# Altium PCB 5811.PcbDoc
Units mil, origin at the board's own origin, x right, y up, seen from the top; angles counter-clockwise.
Board outline 1540.03 x 624.03 mil, 4 copper layers (Top Layer, Internal Plane 1, Signal Layer 1, Bottom Layer), stack 36.417 mil thick; 51 components, 34 nets, 144 pads, 15 vias.
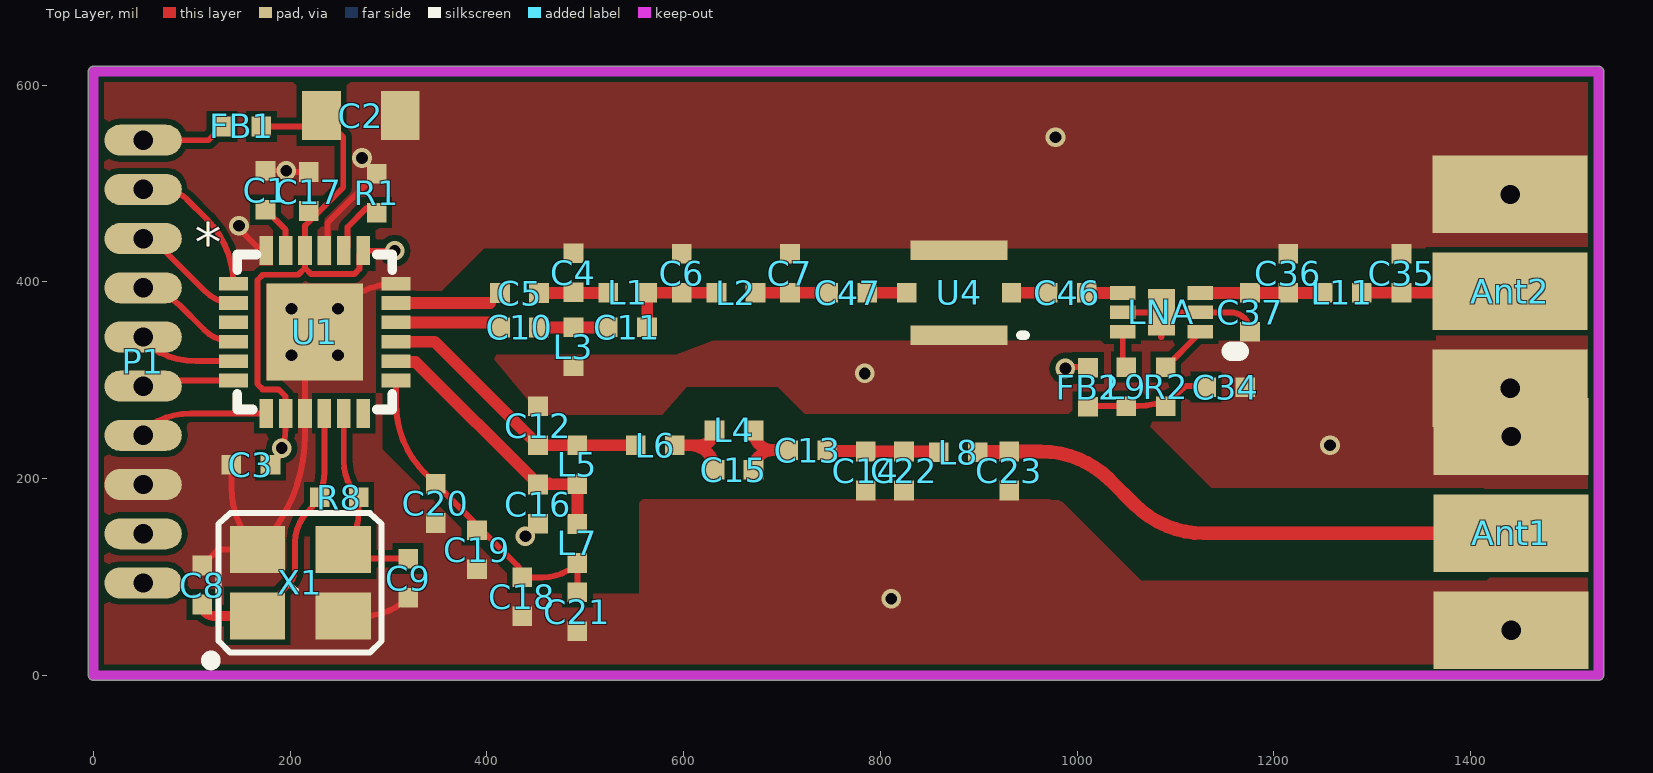
[diagram p0: Top Layer view]
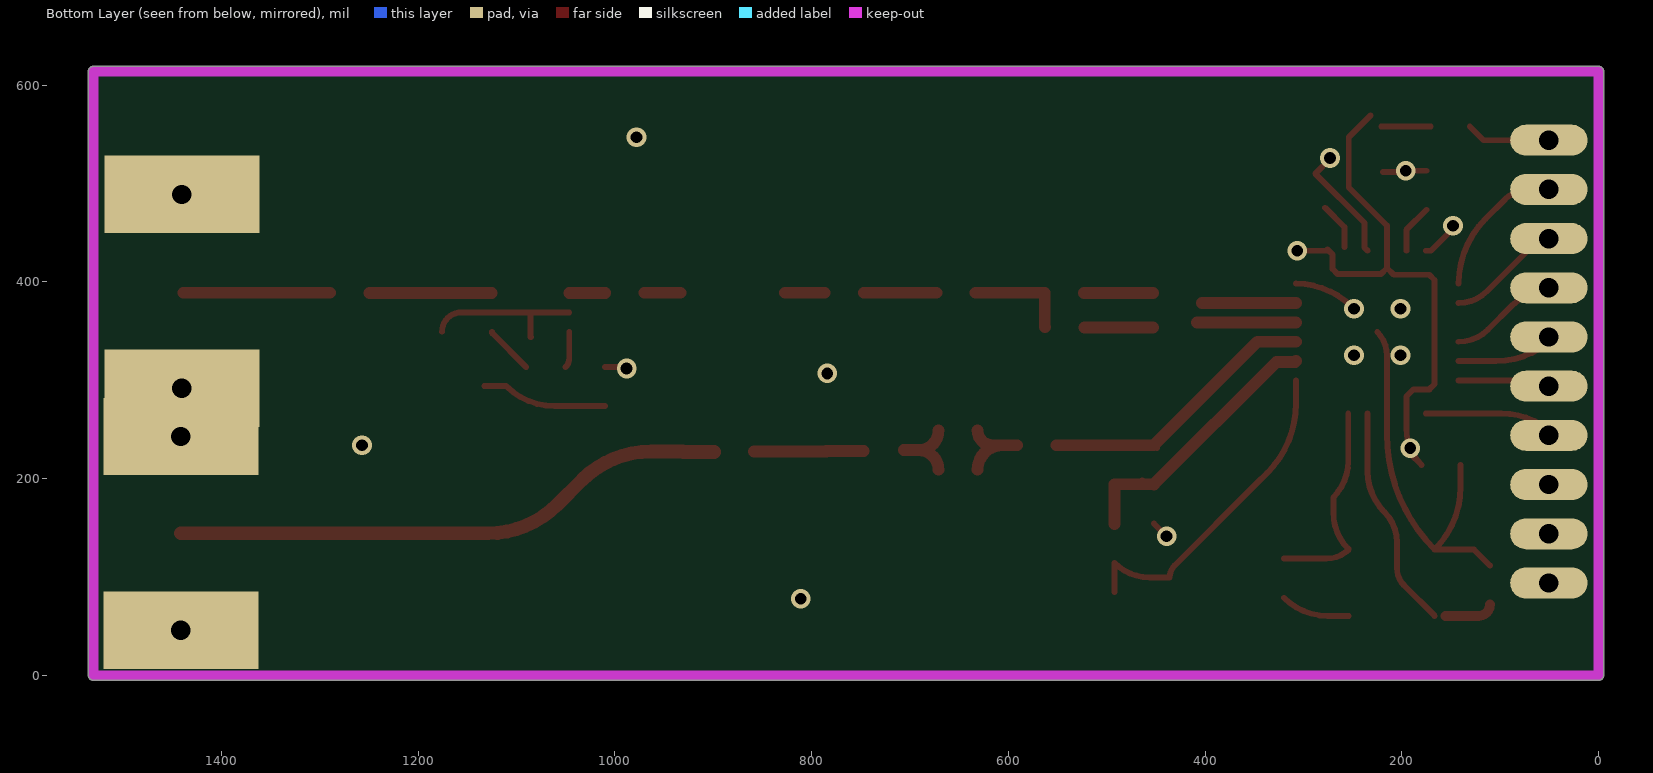
[diagram p1: Bottom Layer view, seen from below]
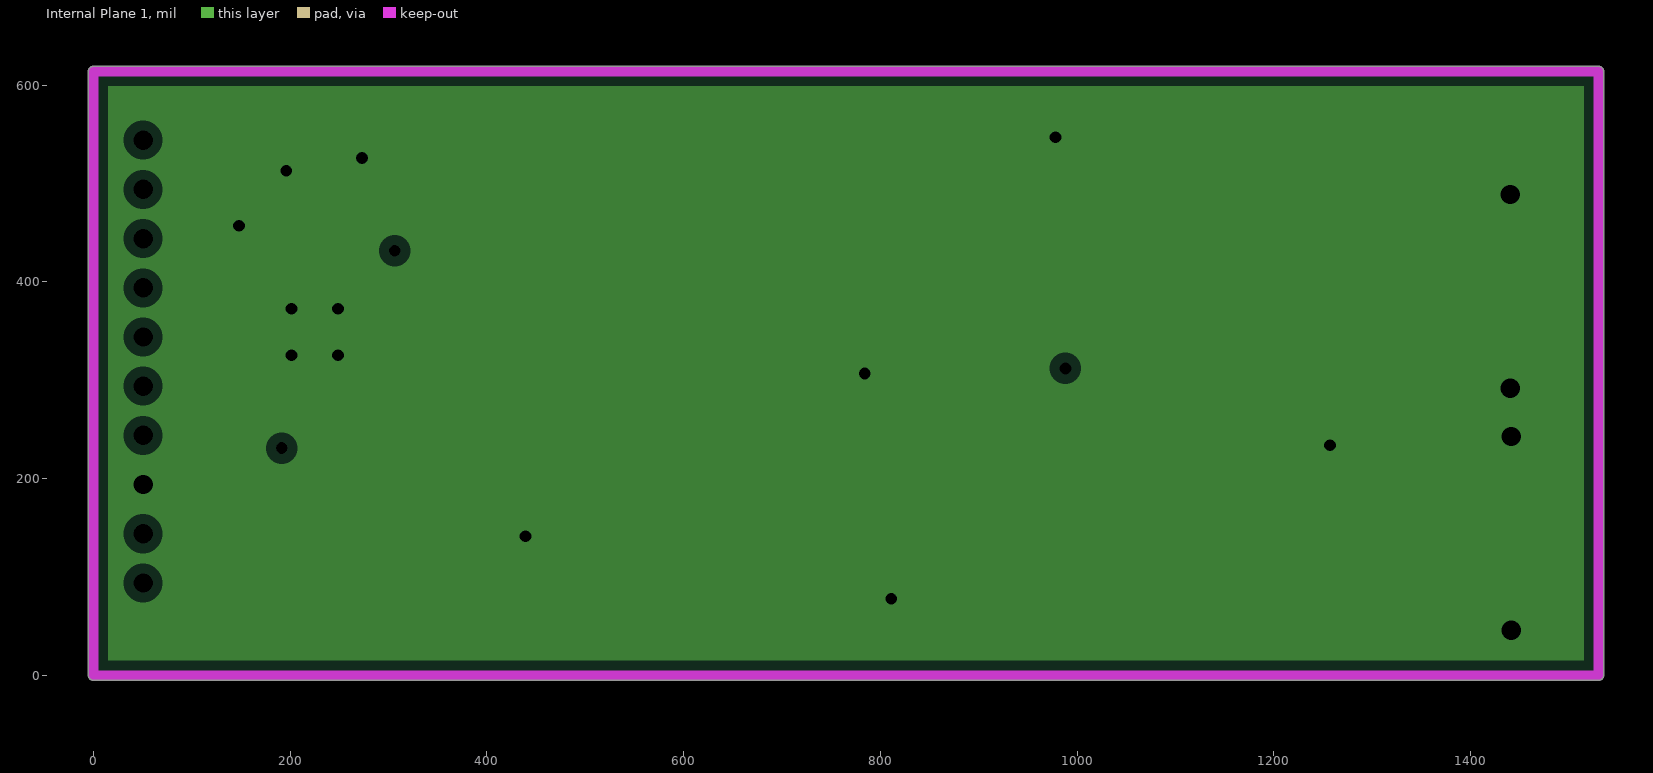
[diagram p2: Internal Plane 1, clearances drawn from the general rule]
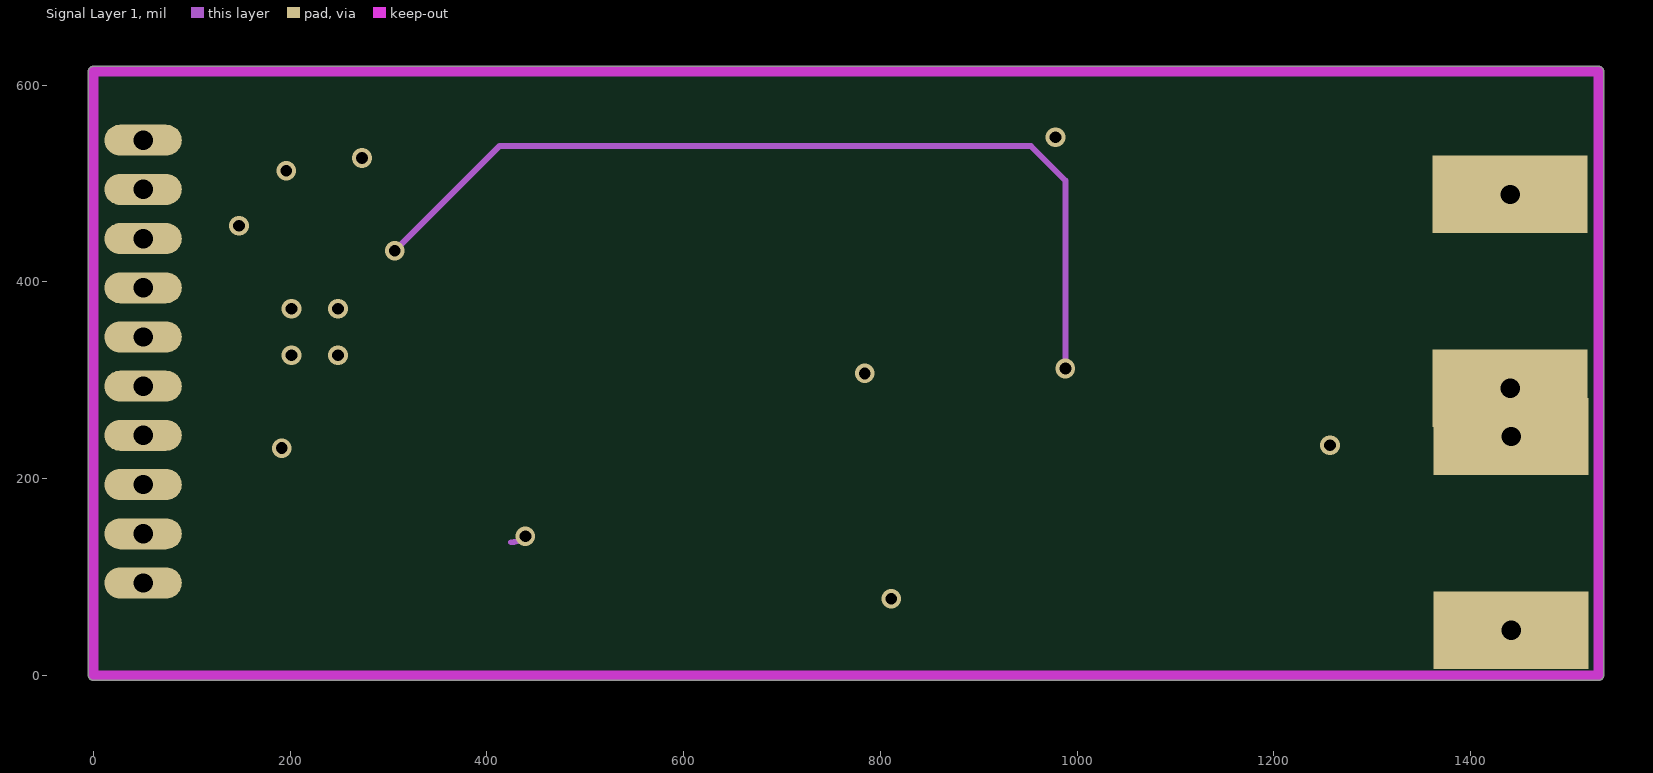
[diagram p3: Signal Layer 1]

## Layer stack, top to bottom
Top Solder: solder mask 0.4, Solder Resist, Dk 3.5
Top Layer: signal copper 0.689
Dielectric 1: prepreg 7.677, FR-4, Dk 4.2
Internal Plane 1: plane copper 0.689, net GND
Dielectric 2: core 18.307, Dk 4.2
Signal Layer 1: signal copper 0.689
Dielectric 3: prepreg 7.677, Dk 4.2
Bottom Layer: signal copper 0.689
Bottom Solder: solder mask 0.4, Solder Resist, Dk 3.5

## Board outline
-5.01,0 -5.01,614 cw(c0,614) 0,619.01 1530,619.01 cw(c1530,614) 1535.02,614 1535.02,0 cw(c1530,0) 1530,-5.01 0,-5.01 cw(c0,0)

## Design rules (kind name [scope] priority, off if disabled: settings)
Clearance [All] p1: gap=6
MinimumSolderMaskSliver [All] p1 off: minsoldermaskwidth=10
PlaneClearance [All] p1: clearance=10
PlaneConnect [All] p1: planeconnectstyle=Direct reliefexpansion=20 reliefentries=4 reliefconductorwidth=10 reliefairgap=10
PolygonConnect [All] p1: connectstyle=Direct reliefconductorwidth=10 reliefentries=4 polygonreliefangle="90 Angle" airgapwidth=10
RoomDefinition LNA [InComponentClass('LNA')] p1 off: confinementstyle=ConfineIn formatcopy=TRUE lockcomponents=FALSE outline 3450,-1911 3670,-1911 3670,-1611 3450,-1611
RoomDefinition BK5811 [InComponentClass('BK5811')] p2 off: confinementstyle=ConfineIn formatcopy=TRUE lockcomponents=FALSE outline 3450,-2291 9750,-2291 9750,-1961 3450,-1961
RoutingVias [All] p1: holewidth=12 width=25 viastyle="Through Hole" minholewidth=12 minwidth=20 maxholewidth=28 maxwidth=50
SilkToSilkClearance [All] p1 off: silktosilkclearance=10
SilkToSolderMaskClearance [IsPad] p1 off: minsilkscreentomaskgap=10 clearancetoexposedcopper=TRUE
SolderMaskExpansion [All] p1: expansion=4
UnpouredPolygon [All] p1: allowunpoured=FALSE
Width [All] p1: maxlimit=20 minlimit=6 preferedwidth=10
24 further rules are at their usual default settings.

## Classes and differential pairs
component class BK5811: C1 C2 C3 C4 C5 C6 C7 C8 C9 C10 C11 C12 C13 C14 C15 C16 C17 C18 C19 C20 C21 FB1 L1 L2 L3 L4 L5 L6 L7 P1 R1 R8 U1 X1
component class LNA: Ant1 Ant2 C22 C23 C34 C35 C36 C37 C46 C47 FB2 L8 L9 L11 LNA R2 U4

## Components (designator, comment, footprint, x,y, rotation, side; value= is the part's Value field where it differs from the comment)
Ant1 "Antenna" SMA 1441,46 r90 top
Ant2 "Antenna" SMA 1440,292 r90 top
C1 "33nF" 0402 175,493 r90 top
C2 "22uF" 0805 272,569 r180 top
C3 "0.1uF" 0402 160,214 r0 top
C4 "1pF" 0402 488,409 r90 top
C5 "1pF" 0402 433,388.68 r0 top
C6 "NC" 0402 598,409 r270 top
C7 "NC" 0402 708,409 r270 top
C8 "Cap" 0402 110.55,91.72 r90 top
C9 "Cap" 0402 320,99 r270 top
C10 "1pF" 0402 433,353.68 r0 top
C11 "1pF" 0402 543,354 r180 top
C12 "1pF" 0402 452,254 r270 top
C13 "1pF" 0402 726,229 r0 top
C14 "1pF" 0402 785,208 r270 top
C15 "1pF" 0402 651,209 r0 top
C16 "1pF" 0402 452,174 r90 top
C17 "0.1uF" 0402 219,492 r270 top
C18 "1pF" 0402 436,80 r270 top
C19 "1pF" 0402 390,128 r270 top
C20 "1pF" 0402 348,175 r270 top
C21 "1pF" 0402 492,65 r270 top
C22 "Cap" 0402 824,208 r270 top
C23 "Cap" 0402 931,208 r270 top
C34 "Cap" 0402 1151,293 r180 top
C35 "Cap" 0402 1329.63,409 r270 top
C36 "Cap" 0402 1214.63,409 r270 top
C37 "Cap" 0402 1175.63,369 r90 top
C46 "Cap" 0402 990,389 r180 top
C47 "Cap" 0402 767,389 r180 top
FB1 "Res2" 0402 151,558 r180 top
FB2 "Res2" 0402 1011,293 r270 top
L1 "2nH" 0402 543,389 r0 top
L2 "0R/10P" 0402 653,389 r0 top
L3 "2nH" 0402 488,334 r90 top
L4 "2nH" 0402 651,249 r0 top
L5 "2nH" 0402 492,214 r90 top
L6 "2nH" 0402 571,234 r0 top
L7 "2nH" 0402 492,134 r90 top
L8 "Inductor" 0402 879,227 r0 top
L9 "Inductor" 0402 1050,293.68 r270 top
L11 "Inductor" 0402 1269.63,389 r180 top
LNA "SKY65404-31" SKY65404-31 1085.63,369 r180 top
P1 "RFInf" RFInf 50.55,544 r0 top
R1 "62K 1%" 0402 288,490 r90 top
R2 "Res2" 0402 1090,293.68 r270 top
R8 "Res2" 0402 250,181 r180 top
U1 "BK5811" BK5811 225,349 r0 top
U4 "BF2012" LFB2H5 880,389 r180 top
X1 "16Mhz" OSCILLATOR-3.2X2.5 210,94 r0 top

## Footprints (in the part's own frame and the unit in brackets; to place one, negate y for a bottom-side part, rotate by r counter-clockwise, add the part's x,y. Pads: shape width x height; smd on the part's side, far side on the other; paste and mask are expansions set on the pad)
0402 [mil] "0402-RES"
  rect 20x20 smd: 1(-19.68,0) 2(20,0)
0805 [mil]
  rect 39.37x50 smd: 1(-40,0) 2(40,0)
  body extent -50,-30 50,30, height 31
BK5811 [mm]
  rect 2.5x2.5 smd: 0(0,0)
  rect 0.75x0.35 smd: 1(-2.1,1.25) 2(-2.1,0.75) 3(-2.1,0.25) 4(-2.1,-0.25) 5(-2.1,-0.75) 6(-2.1,-1.25) 13(2.1,-1.25) 14(2.1,-0.75) 15(2.1,-0.25) 16(2.1,0.25) 17(2.1,0.75) 18(2.1,1.25)
  rect 0.35x0.75 smd: 7(-1.25,-2.1) 8(-0.75,-2.1) 9(-0.25,-2.1) 10(0.25,-2.1) 11(0.75,-2.1) 12(1.25,-2.1) 19(1.25,2.1) 20(0.75,2.1) 21(0.25,2.1) 22(-0.25,2.1) 23(-0.75,2.1) 24(-1.25,2.1)
  silkscreen extent -2,-2 2,2
LFB2H5 [mm]
  rect 2.5x0.5 smd: 0(0,1.1) 0(0,-1.1)
  rect 0.5x0.5 smd: 1(-1.35,0) 2(1.35,0)
  silkscreen extent -1.7,1.1 -1.6,1.1, body extent -1.25,-1 1.25,1, height 0.9
OSCILLATOR-3.2X2.5 [mil] "OSCILLATOR-3.2X2.5"
  rect 56x48 smd: 1(-43.31,-33.46) 2(44,-33.46) 3(44,34) 4(-43.31,34)
  silkscreen extent -95,-83 83,71
RFInf [mm]
  oval 2x0.8 hole 0.5: 1(0,0) 2(0,-1.27) 3(0,-2.54) 4(0,-3.81) 5(0,-5.08) 6(0,-6.35) 7(0,-7.62) 8(0,-8.89) 9(0,-10.16) 10(0,-11.43)
SKY65404-31 [mm]
  rect 0.7x1.2 smd: 0(0,0)
  rect 0.65x0.35 smd: 1(-1,0.5) 2(-1,0) 3(-1,-0.5) 4(1,-0.5) 5(1,0) 6(1,0.5)
  silkscreen extent -2,1 -1.8,1
SMA [mm]
  rect 2x4 smd: 1(2.5,0)
  rect 2x4 hole 0.5: GND(0,0) GND(5,0)

## Part data
C1 C2 C3 C4 C5 C6 C7 C10 C11 C12 C13 C14 C15 C16 C17 C18 C19 C20 C21: library part Cap, "Capacitor"
C8 C9 C22 C23 C34 C35 C36 C37 C46 C47: "Capacitor"
FB1 FB2 R2 R8: "Resistor"
L1 L2 L3 L4 L5 L6 L7: library part Inductor, "Inductor"
R1: library part Res2, "Resistor"
X1: library part OSCILLATOR-3.2X2.5, "Crystal Oscillator in 3.2x2.5 SMD"

## Via types
v1: diameter 20, hole 12, Top Layer to Bottom Layer, 11 vias
v2: diameter 20/20/20 (per signal layer), hole 12, Top Layer to Bottom Layer, 4 vias

## Nets (pads, with @x,y where several pads share a name; then routed paths per layer and width w, separated by ;. In a path a pad name is that pad's centre, name@x,y a point inside that pad or via, vN(x,y) a via of type N, cw(c..) or ccw(c..) an arc to the next point about the centre after c; other vN are vias at no path point)
3.3LNA: C34.2 FB2.2 L9.2 R2.2 | length 128.1
  Top Layer w6: FB2.2@1010,273.68 1061.05,273.68 ccw(c1061.05,343.58) 1110.47,294.16 C34.2@1132.64,294.16
3.3NRF: C2.2 C3.2 C17.2 FB1.1 FB2.1 U1.8 U1.19 U1.22 | length 1587.1
  Top Layer w6: FB1.1 C2.2@221,558 ; C2.2 254,547 254,496 215.16,457.16 U1.22 215.16,414.16 ; U1.19@275.71,433.18 U1.19 ; v1(306.32,431.68) U1.19 ; v1(988,312) 989.37,313.37 FB2.1@1010,313.37 ; v1(191.42,231.07) cw(c142.65,251.35) C3.2 191.42,225.42 v1(191.42,231.07) ; v1(191.42,231.07) ccw(c142.65,251.35) 195.47,251.35 U1.8 195.47,283.53 188.21,290.79 172.06,290.79 166.79,296.06 166.79,401.94 172.06,407.21 208.21,407.21 215.16,414.16 ; 215.16,414.16 221.4,407.91 265.15,407.91 270.42,413.19 270.42,427.88 U1.19
  Signal Layer 1 w6: v1(306.32,431.68) 412.65,538 953,538 988,503 v1(988,312)
CE: P1.2 U1.1 | length 154.1
  Top Layer w6: P1.2@45,494 70.86,494 cw(c70.86,459.86) 95,484 115.12,463.88 cw(c49.46,398.21) U1.1
CSN: P1.3 U1.2 | length 121.1
  Top Layer w6: P1.3@45,444 cw(c45,407.79) 70.61,433.39 113.56,390.44 ccw(c142.32,419.21) U1.2
GND: Ant1.GND Ant2.GND C1.2 C2.1 C3.1 C4.2 C6.1 C7.1 C8.2 C9.2 C12.1 C14.2 C16.1 C17.1 C18.2 C19.2 C20.2 C21.2 C22.2 C23.2 C34.1 C35.1 C36.1 C37.1 L3.1 LNA.0 LNA.2 LNA.5 P1.8 R1.2 U1.0 U1.9 U1.18 U1.21 U1.24 U4.0 X1.2 X1.4 | length 941.4
  Top Layer w6: C8.2 126.83,128 X1.4 ; C3.1 140.32,191.68 ccw(c230.37,191.68) X1.4 ; v1(148,457) 145,457 170.32,431.68 U1.24 ; C1.2 v1(196,513) ; v1@197.32,511.68 C17.1 ; U1.0 ccw(c248.76,325.24) 215.16,325.24 U1.9 215.16,245 cw(c49.69,245) X1.4 ; U1.21 238,434.83 238,460 R1.2 272,526 v1(273,526) ; v2(248.62,372.62) 250.55,374.55 cw(c307.68,317.42) U1.18 ; X1.2 275.42,60.54 ccw(c275.42,123.58) C9.2 ; v1(439.15,141.47) C16.1 ; LNA.5 LNA.0 ; 1085,344 1085.63,344 LNA.0 ; C37.1 ccw(c1155.94,349.32) 1155.94,369 LNA.2 LNA.0
  Signal Layer 1 w6: 424.33,135.33 ccw(c424.33,156.29) v1(439.15,141.47)
  other v1: 811,78 1257,234 784,307 978,547
  other v2: 201.38,325.38 248.62,325.38 201.38,372.62
IRQ: P1.7 U1.7 | length 136.8
  Top Layer w6: P1.7@45,244 cw(c98.89,190.11) 98.89,266.32 U1.7
MISO: P1.6 U1.6 | length 98.9
  Top Layer w6: P1.6@45,294 cw(c58.97,280.03) 58.97,299.79 U1.6
MOSI: P1.5 U1.5 | length 103.9
  Top Layer w6: P1.5@45,344 ccw(c104.21,403.21) 104.21,319.47 U1.5
NetAnt1_1: Ant1.1 C23.1 L8.2 | length 568.1
  Top Layer w14: L8.2 929.35,227 ccw(c929.35,229.34) C23.1 962.89,227.68 cw(c962.89,127.68) 1033.6,198.4 1058.29,173.71 ccw(c1129,244.43) 1129,144.43 Ant1.1
NetAnt2_1: Ant2.1 C35.2 L11.1 | length 149.3
  Top Layer w12: L11.1 C35.2 Ant2.1@1438.57,389
NetC1_1: C1.1 U1.23 | length 50.1
  Top Layer w6: C1.1 195.47,452.84 U1.23
NetC4_1: C4.1 C5.2 L1.1 | length 70.4
  Top Layer w6: L1.1@523,388.68 L1.1
  Top Layer w12: C5.2 L1.1@523,388.68
NetC5_1: C5.1 U1.17 | length 95.5
  Top Layer w12: U1.17 403.16,378.53
NetC6_2: C6.2 C11.1 L1.2 L2.1 | length 105.9
  Top Layer w6: L1.2@562.69,388.68 L1.2
  Top Layer w12: C11.1 563,354.32 L1.2 C6.2 L2.1
NetC7_2: C7.2 C47.2 L2.2 | length 74
  Top Layer w12: L2.2 C7.2 C47.2
NetC8_1: C8.1 R8.2 U1.10 X1.1 | length 280.1
  Top Layer w6: X1.1 197.82,91.66 ccw(c180.48,109) 205,109 205,135.32 cw(c248.68,135.32) 217.79,166.21 ccw(c176.63,207.37) 234.84,207.37 U1.10
  Top Layer w10: C8.1 ccw(c122.05,72.03) 122.05,60.54 X1.1@155.55,60.54
NetC9_1: C9.1 R8.1 U1.11 X1.3 | length 216.5
  Top Layer w6: X1.3@254.53,129.27 cw(c252.73,129.27) X1.3 ; U1.11 254.53,217.59 ccw(c306.28,217.59) R8.1 269.68,165.87 cw(c216.13,165.87) X1.3 ; C9.1 276.49,118.68 cw(c276.49,150.49) X1.3
NetC10_1: C10.1 U1.16 | length 100.5
  Top Layer w12: U1.16 C10.1@408.16,358.84
NetC10_2: C10.2 C11.2 L3.2 | length 70.1
  Top Layer w6: C11.2@522.69,353.68 C11.2
  Top Layer w12: C10.2 C11.2@522.69,353.68
NetC12_2: C12.2 L5.2 L6.1 U1.15 | length 291.4
  Top Layer w6: C12.2@449,231 C12.2
  Top Layer w12: U1.15 346.84,339.16 C12.2 L5.2 L6.1
NetC13_1: C13.1 C15.2 L4.2 | length 78.1
  Top Layer w12: C15.2 cw(c691,209) 691,229 ; L4.2 ccw(c691,249) 691,229 ; C13.1 691,229
NetC13_2: C13.2 C14.1 C22.1 L8.1 | length 111.6
  Top Layer w12: C13.2@747,228 C14.1@785,228 ; C14.1 C22.1 L8.1@858.63,227.68
NetC15_1: C15.1 L4.1 L6.2 | length 88.1
  Top Layer w12: L6.2 606.31,234 ; C15.1 ccw(c606.31,209) 606.31,234 ; L4.1 cw(c616.31,249) 616.31,234 606.31,234
NetC16_2: C16.2 L5.1 L7.2 U1.14 | length 281.6
  Top Layer w6: C16.2@449,197 C16.2 ; 463.68,198 464,198.32
  Top Layer w12: U1.14 308.47,318.68 327.41,318.68 C16.2@452,194.09 ; C16.2 C16.2@452,194.09 ; L7.2 L5.1 452,194.32 C16.2@452,194.09
NetC18_1: C18.1 C19.1 C20.1 C21.1 L7.1 U1.13 | length 337.8
  Top Layer w6: U1.13 307.68,276.43 ccw(c407.68,276.43) 336.97,205.72 C20.1 431.05,111.63 cw(c419.1,99.68) C18.1 456.68,99.68 ccw(c456.68,149.63) L7.1 C21.1
NetC36_2: C36.2 C37.2 L11.2 LNA.3 | length 124.8
  Top Layer w6: L11.2@1249.31,388.68 L11.2
  Top Layer w12: LNA.3 L11.2@1249.31,388.68
NetC46_1: C46.1 LNA.4 | length 37.3
  Top Layer w6: LNA.4@1045.94,389 LNA.4
  Top Layer w12: C46.1 1009.69,388.68 LNA.4
NetC46_2: C46.2 U4.1 | length 36.9
  Top Layer w12: U4.1 C46.2
NetC47_1: C47.1 U4.2 | length 40.2
  Top Layer w12: C47.1 U4.2
NetFB1_2: FB1.2 P1.1 | length 86.2
  Top Layer w6: P1.1 117,544 FB1.2
NetL9_1: L9.1 LNA.6 | length 36.9
  Top Layer w6: LNA.6 1046.26,322.4 ccw(c1059.03,322.4) L9.1
NetLNA_1: LNA.1 R2.1 | length 50.3
  Top Layer w6: R2.1 1124.33,347.7 ccw(c1122.72,349.32) LNA.1
NetR1_1: R1.1 U1.20 | length 48
  Top Layer w6: U1.20@258.32,435.47 258.32,455.64 R1.1@278,475.32
SCK: P1.4 U1.4 | length 115.6
  Top Layer w6: P1.4@45,394 cw(c45,333.64) 87.68,376.32 112.48,351.52 ccw(c142.32,381.36) U1.4
pads on no net: P1.9 P1.10 U1.3 U1.12

## Polygon pours and split planes (outlines as drawn)
GND on Top Layer "Top Layer-No Net" (solid, remove dead copper, pour order 2): -62,667 1553.58,667 cw(c1553.58,567) 1624.29,637.71 1628,634 cw(c1611.1,617.1) 1635,617.1 1635,-56 1635,-63.51 cw(c1614.51,-63.51) 1629,-78 cw(c1609.69,-58.69) 1609.69,-86 1105,-86 40.42,-86 cw(c40.42,14) -30.29,-56.71 -43,-44 -70.71,-16.29 cw(c0,54.42) -100,54.42 -100,498 -100,615.72 cw(c-31.72,615.72) -80,664
GND on Internal Plane 1 (split plane): 1514.92,15.08 15.08,15.08 15.08,598.92 1514.92,598.92

## Keep-outs
Keep-Out Layer:
  lines w10: 0,0 1530,0 1530,614 0,614 0,0

## Other copper
Top Layer:
  pour cut-out: 979,266.16 1061,266 1136,191 1413,191 1449,155 1449,129 1416,96 1065,96 982,179 981,178 976,178
  pour cut-out: 293.71,388.4 293.71,229.94 440.75,82.89 554.73,82.89 554.73,179 979,179 979,266.16 723.23,266.16 695.87,293.52 603.16,293.52 578.25,264.98 454.4,264.98 403.66,326 591.74,326 629.63,340 1365,340 1365,434 397.38,434 351.78,388.4

## Text inside footprints (layer, text, board x,y; h text height)
U1: Top Overlay "*" at 102.95,419.87 h40